# Altium PCB main.PcbDoc
Units mm, origin at the board's own origin, x right, y up, seen from the top; angles counter-clockwise.
Board outline 105.56 x 68.22 mm, 2 copper layers (Top Layer, Bottom Layer); 49 components, 92 nets, 304 pads, 322 vias.
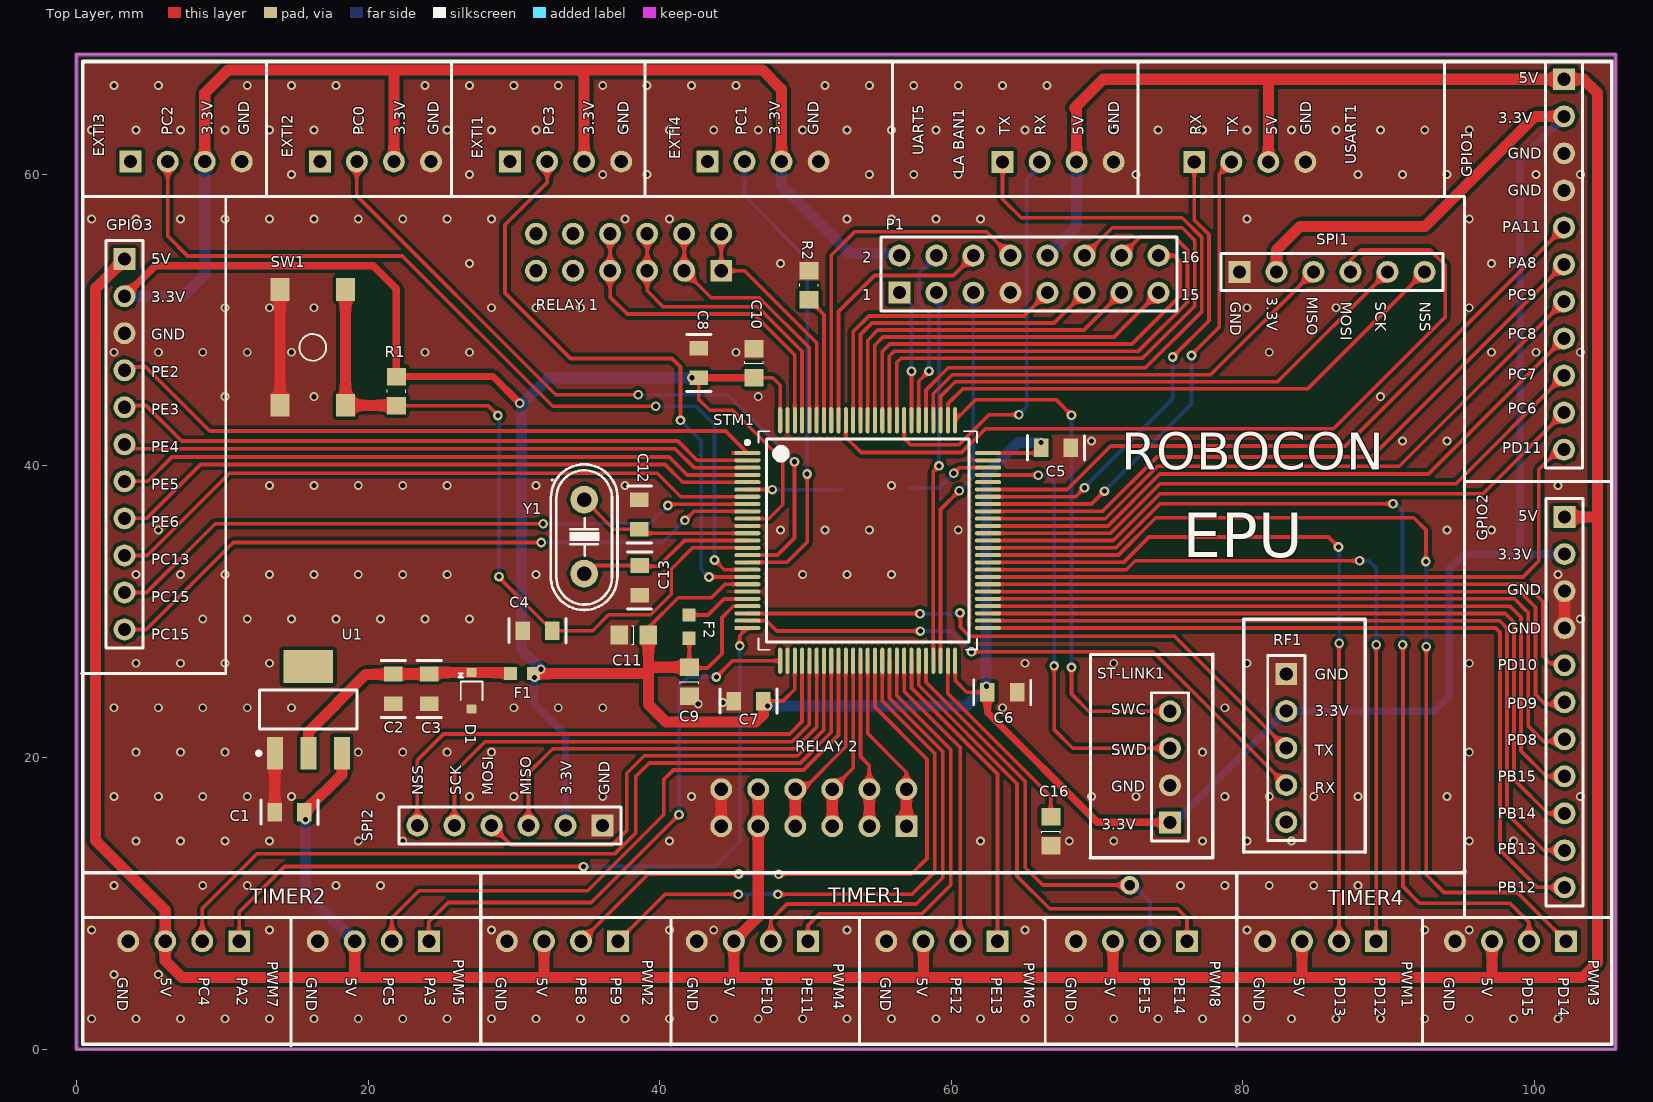
[diagram p0: Top Layer view]
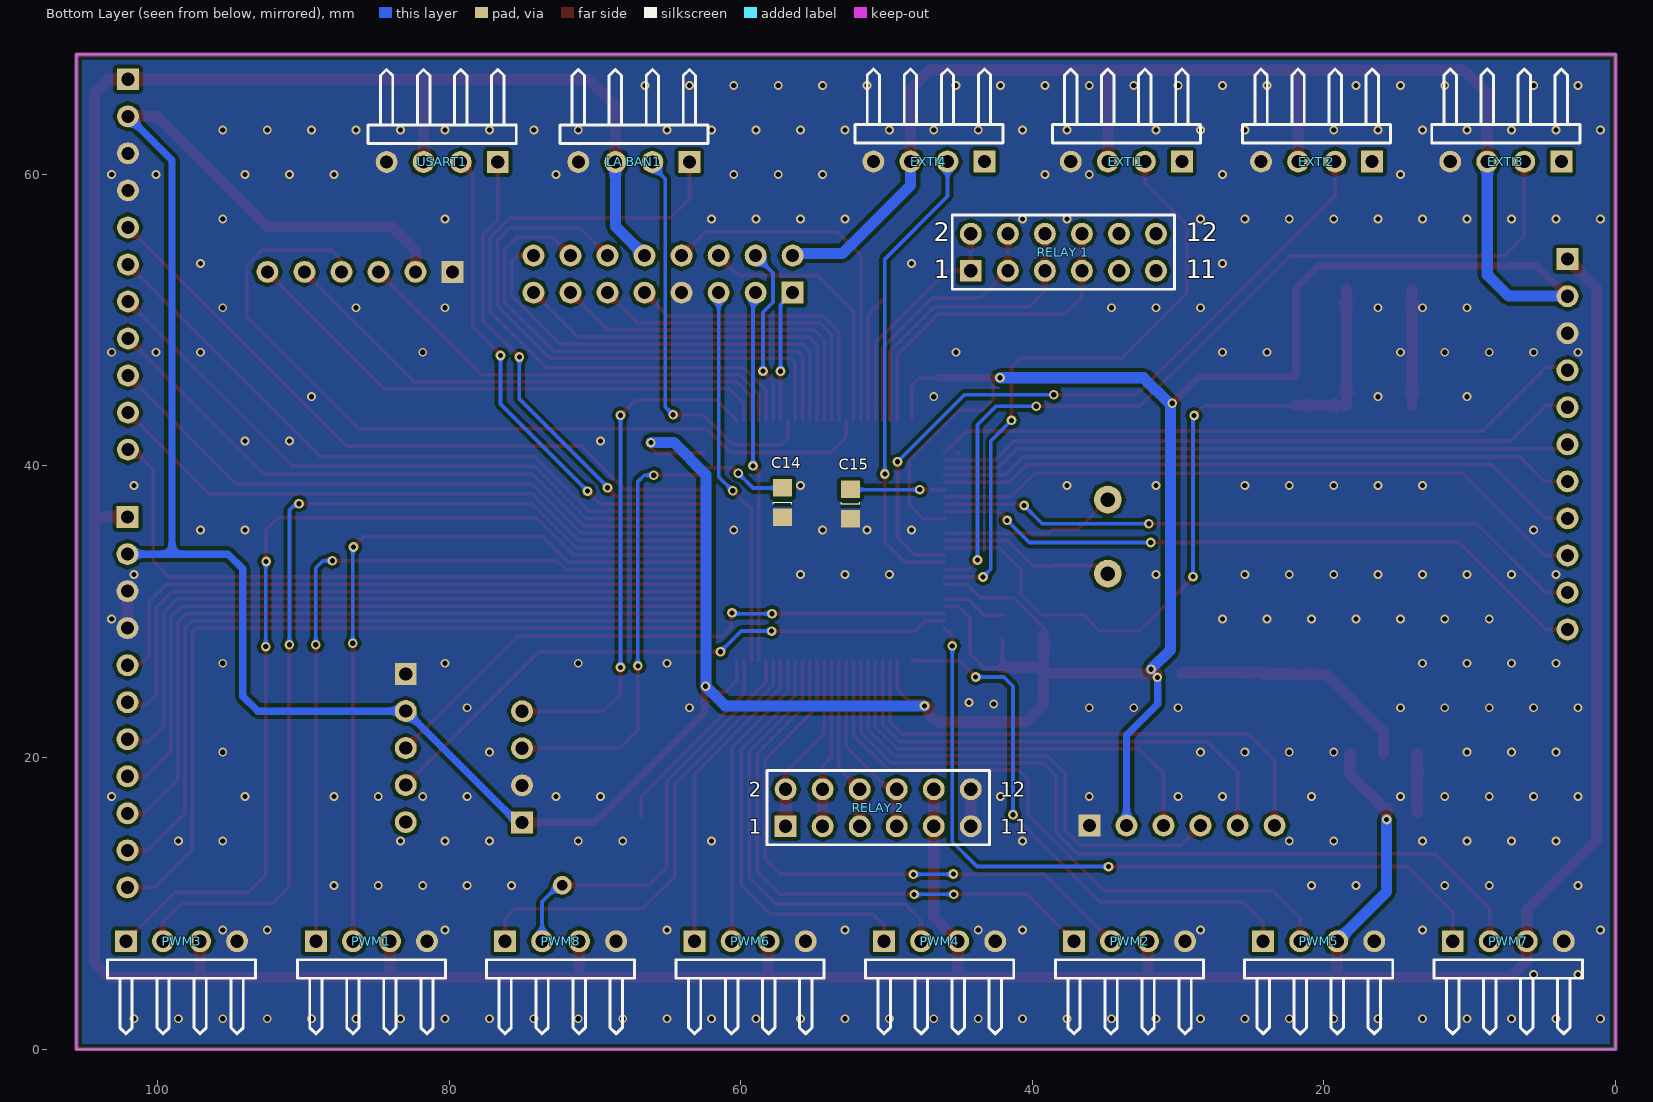
[diagram p1: Bottom Layer view, seen from below]

## Layer stack, top to bottom
Top Layer: signal copper 0.0356
Dielectric: dielectric 0.32, FR-4, Dk 4.8
Bottom Layer: signal copper 0.0356

## Board outline
0,0 105.562,0 105.562,68.224 0,68.224

## Design rules (kind name [scope] priority, off if disabled: settings)
Clearance [All] p1: gap=0.229
PolygonConnect [All] p1: connectstyle=Direct reliefconductorwidth=0.508 reliefentries=4 polygonreliefangle="90 Angle"
RoutingVias [All] p1: holewidth=0.356 width=0.66 viastyle="Through Hole" minholewidth=0.356 minwidth=0.66 maxholewidth=0.356 maxwidth=0.66
SilkscreenOverComponentPads SilkToSolderMaskClearance [IsPad] p1: minsilkscreentomaskgap=0.254
SolderMaskExpansion [All] p1: expansion=0.102
Width [All] p1: maxlimit=0.762 minlimit=0.254 preferedwidth=0.508
27 further rules are at their usual default settings.

## Components (designator, comment, footprint, x,y, rotation, side; value= is the part's Value field where it differs from the comment)
C1 "0.1uF" C0805#1 14.605,16.256 r180 top
C2 "10uF" C0805#1 21.742,24.714 r270 top
C3 "0.1uF" C0805#1 24.206,24.714 r270 top
C4 "0.1uF" C0805#1 31.623,28.702 r180 top
C5 "0.1uF" C0805#1 67.183,41.25 r0 top
C6 "0.1uF" C0805#1 63.5,24.486 r0 top
C7 "0.1uF" C0805#1 46.101,23.876 r180 top
C8 "0.1uF" C0805#1 42.672,47.066 r90 top
C9 "0.1uF" C0805#2 42.037,25.197 r270 top
C10 "0.1uF" C0805#2 46.482,47.041 r90 top
C11 "0.1uF" C0805#2 38.227,28.397 r180 top
C12 "C33pf 0805" C0805#1 38.608,36.678 r90 top
C13 "C33pf 0805" C0805#1 38.633,32.156 r270 top
C14 "2.2uF" C0805#2 57.125,37.49 r270 bottom
C15 "4.7uF" C0805#2 52.476,37.389 r90 bottom
C16 "2.2uF" C0805#2 66.827,14.935 r270 top
D1 "D14V0S1U2WS-7" SOD323 27.102,24.587 r270 top
EXTI1 "Header 4H" HDR1X4H 29.741,60.876 r0 bottom locked
EXTI2 "Header 4H" HDR1X4H 16.691,60.876 r0 bottom locked
EXTI3 "Header 4H" HDR1X4H 3.716,60.876 r0 bottom locked
EXTI4 "Header 4H" HDR1X4H 43.282,60.884 r0 bottom
F1 "FBMH1608HM221" L0603 30.556,25.756 r0 top
F2 "BK1608HM102-T" L0603 42.012,28.981 r90 top
GPIO1 "Header 11" HDR1X11 102.032,66.523 r270 top
GPIO2 "Header 11" HDR1X11 102.066,36.496 r270 top
GPIO3 "Header 11" HDR1X11 3.291,54.186 r270 top
"LA BAN1" "Header 4H" HDR1X4H 63.521,60.851 r0 bottom locked
P1 "Header 8X2" HDR2X8 56.439,51.892 r0 top
PWM1 "Header 4H" HDR1X4H 89.141,7.401 r180 bottom locked
PWM2 "Header 4H" HDR1X4H 37.141,7.401 r180 bottom locked
PWM3 "Header 4H" HDR1X4H 102.166,7.401 r180 bottom locked
PWM4 "Header 4H" HDR1X4H 50.166,7.401 r180 bottom locked
PWM5 "Header 4H" HDR1X4H 24.166,7.401 r180 bottom locked
PWM6 "Header 4H" HDR1X4H 63.166,7.401 r180 bottom locked
PWM7 "Header 4H" HDR1X4H 11.166,7.401 r180 bottom locked
PWM8 "Header 4H" HDR1X4H 76.166,7.401 r180 bottom locked
R1 "4.7k" R0805 21.946,45.136 r270 top
R2 "4.7k" R0805 50.241,52.4 r90 top
"RELAY 1" "Header 6X2" HDR2X6 44.221,53.391 r180 bottom locked
"RELAY 2" "Header 6X2" HDR2X6 56.921,15.291 r180 bottom locked
RF1 "Header 5" HDR1X5 82.982,25.73 r270 top
SPI1 "Header 6" HDR1X6 79.768,53.314 r0 top
SPI2 "Header 6" HDR1X6 36.081,15.342 r180 top
ST-LINK1 "Header 4" HDR1X4 74.998,15.556 r90 top
STM1 "STM32F405VGT6TR" TSQFP50P1750X1750X160-100N 54.27,34.888 r0 top locked
SW1 "SW-SPST-4P-PTS645SM43SMTR92 LFS" "SW-PTS645SM43SMTR92 LFS" 16.205,48.133 r90 top
U1 "AMS1117_3.3V" SOT233X180-4N 15.9,23.266 r90 top
USART1 "Header 4H" HDR1X4H 76.671,60.851 r0 bottom locked
Y1 "8MHz" XT2 34.823,35.154 r90 top

## Footprints (in the part's own frame and the unit in brackets; to place one, negate y for a bottom-side part, rotate by r counter-clockwise, add the part's x,y. Pads: shape width x height; smd on the part's side, far side on the other; paste and mask are expansions set on the pad)
C0805#1 [mm] "Chip Resistor; Body 2.0 x 1.3 mm (LxW typ)"
  rect 1x1.27 smd: 1(-1.016,0) 2(1.016,0)
  silkscreen extent -1.96,-0.84 1.96,0.84, body extent -1,-0.62 1,0.63, height 0.78
C0805#2 [mm]
  rect 1.2x1.3 smd: 1(-1,0) 2(1,0)
  Top Layer pour cut-out: -0.254,0.66 0.254,0.66 0.254,-0.66 -0.254,-0.66
  silkscreen extent 0,-0.64 0.13,0.64, body extent -1,-0.6 1,0.6, height 0.8
HDR1X4 [mm] "Connector; Header; 4 Position"
  rect 1.5x1.5 hole 0.9: 1(0,0)
  round 1.5 hole 0.9: 2(2.54,0) 3(5.08,0) 4(7.62,0)
  silkscreen extent -1.27,-1.27 8.89,1.27, body extent -1.27,-1.27 8.89,1.27, height 7
HDR1X4H [mm] "Connector; Header; 4 Position; Right Angle"
  rect 1.5x1.5 hole 0.9: 1(0,0)
  round 1.5 hole 0.9: 2(2.54,0) 3(5.08,0) 4(7.62,0)
  silkscreen extent -1.27,-6.35 8.89,-1.27, body extent -1.27,-7 8.89,1.27, height 4.33
HDR1X5 [mm] "Connector; Header; 5 Position"
  rect 1.5x1.5 hole 0.9: 1(0,0)
  round 1.5 hole 0.9: 2(2.54,0) 3(5.08,0) 4(7.62,0) 5(10.16,0)
  silkscreen extent -1.27,-1.27 11.43,1.27, body extent -1.27,-1.27 11.43,1.27, height 7
HDR1X6 [mm] "Connector; Header; 6 Position"
  rect 1.5x1.5 hole 0.9: 1(0,0)
  round 1.5 hole 0.9: 2(2.54,0) 3(5.08,0) 4(7.62,0) 5(10.16,0) 6(12.7,0)
  silkscreen extent -1.27,-1.27 13.97,1.27, body extent -1.27,-1.27 13.97,1.27, height 7
HDR1X11 [mm] "Connector; Header; 11 Position"
  rect 1.5x1.5 hole 0.9: 1(0,0)
  round 1.5 hole 0.9: 2(2.54,0) 3(5.08,0) 4(7.62,0) 5(10.16,0) 6(12.7,0) 7(15.24,0) 8(17.78,0) 9(20.32,0) 10(22.86,0) 11(25.4,0)
  silkscreen extent -1.27,-1.27 26.67,1.27, body extent -1.27,-1.27 26.67,1.27, height 7
HDR2X6 [mm] "Connector; Header; 6x2 Position"
  rect 1.5x1.5 hole 0.9: 1(0,0)
  round 1.5 hole 0.9: 2(0,2.54) 3(2.54,0) 4(2.54,2.54) 5(5.08,0) 6(5.08,2.54) 7(7.62,0) 8(7.62,2.54) 9(10.16,0) 10(10.16,2.54) 11(12.7,0) 12(12.7,2.54)
  silkscreen extent -1.27,-1.27 13.97,3.81, body extent -1.27,-1.27 13.97,3.81, height 7
HDR2X8 [mm] "Connector; Header; 8x2 Position"
  rect 1.5x1.5 hole 0.9: 1(0,0)
  round 1.5 hole 0.9: 2(0,2.54) 3(2.54,0) 4(2.54,2.54) 5(5.08,0) 6(5.08,2.54) 7(7.62,0) 8(7.62,2.54) 9(10.16,0) 10(10.16,2.54) 11(12.7,0) 12(12.7,2.54) 13(15.24,0) 14(15.24,2.54) 15(17.78,0) 16(17.78,2.54)
  silkscreen extent -1.27,-1.27 19.05,3.81, body extent -1.27,-1.27 19.05,3.81, height 1.5
L0603 [mm]
  rect 0.9x0.9 smd: 1(-0.8,0) 2(0.8,0)
  Top Layer pour cut-out: -0.254,0.508 0.254,0.508 0.254,-0.508 -0.254,-0.508
  body extent -0.8,-0.4 0.8,0.4, height 0.6
R0805 [mm]
  rect 1.2x1.3 smd: 1(-1,0) 2(1,0)
  Top Layer pour cut-out: -0.254,0.762 0.254,0.762 0.254,-0.762 -0.254,-0.762
  silkscreen extent -0.08,-0.64 0.1,0.64, body extent -1,-0.6 1,0.6, height 0.6
SOD323 [mm] "SOD-323; 2 Leads; Body 1.8 x 1.35 mm, (LxW)"
  round 0.508 on Mech14: 0(0,0)
  rrect25% 0.6x0.7 smd: 1(1.25,0) 2(-1.25,0)
  silkscreen extent -1.2,-0.9 0.64,0.75, body extent -1.3,-0.68 1.3,0.68, height 1.1
SOT233X180-4N [mm] "SOT223, 4-Leads, Body 6.50x7.25mm (avg), Pitch 2.30mm, IPC Medium Density"
  rect 2.25x1.1 smd: 1(-2.975,2.3) 2(-2.975,0) 3(-2.975,-2.3)
  rect 2.25x3.4 smd: 4(2.975,0)
  silkscreen extent -3.1,-3.35 1.37,3.52, body extent -3.62,-3.35 3.62,3.35, height 1.8
"SW-PTS645SM43SMTR92 LFS" [mm]
  rect 1.55x1.3 smd: 1(-3.975,2.25) 2(3.975,2.25) 3(-3.975,-2.25) 4(3.975,-2.25)
  silkscreen extent -0.91,-0.92 0.91,0.91, body extent -4.5,-3 4.5,3, height 5
TSQFP50P1750X1750X160-100N [mm] "TSQFP, 100-Leads, Body 14.50x14.50mm, Pitch 0.50mm, IPC Medium Density"
  oval 1.8x0.279 smd: 1(-8.25,6) 2(-8.25,5.5) 3(-8.25,5) 4(-8.25,4.5) 5(-8.25,4) 6(-8.25,3.5) 7(-8.25,3) 8(-8.25,2.5) 9(-8.25,2) 10(-8.25,1.5) 11(-8.25,1) 12(-8.25,0.5) 13(-8.25,0) 14(-8.25,-0.5) 15(-8.25,-1) 16(-8.25,-1.5) 17(-8.25,-2) 18(-8.25,-2.5) 19(-8.25,-3) 20(-8.25,-3.5) 21(-8.25,-4) 22(-8.25,-4.5) 23(-8.25,-5) 24(-8.25,-5.5) 25(-8.25,-6) 51(8.25,-6) 52(8.25,-5.5) 53(8.25,-5) 54(8.25,-4.5) 55(8.25,-4) 56(8.25,-3.5) 57(8.25,-3) 58(8.25,-2.5) 59(8.25,-2) 60(8.25,-1.5) 61(8.25,-1) 62(8.25,-0.5) 63(8.25,0) 64(8.25,0.5) 65(8.25,1) 66(8.25,1.5) 67(8.25,2) 68(8.25,2.5) 69(8.25,3) 70(8.25,3.5) 71(8.25,4) 72(8.25,4.5) 73(8.25,5) 74(8.25,5.5) 75(8.25,6)
  oval 0.279x1.8 smd: 26(-6,-8.25) 27(-5.5,-8.25) 28(-5,-8.25) 29(-4.5,-8.25) 30(-4,-8.25) 31(-3.5,-8.25) 32(-3,-8.25) 33(-2.5,-8.25) 34(-2,-8.25) 35(-1.5,-8.25) 36(-1,-8.25) 37(-0.5,-8.25) 38(0,-8.25) 39(0.5,-8.25) 40(1,-8.25) 41(1.5,-8.25) 42(2,-8.25) 43(2.5,-8.25) 44(3,-8.25) 45(3.5,-8.25) 46(4,-8.25) 47(4.5,-8.25) 48(5,-8.25) 49(5.5,-8.25) 50(6,-8.25) 76(6,8.25) 77(5.5,8.25) 78(5,8.25) 79(4.5,8.25) 80(4,8.25) 81(3.5,8.25) 82(3,8.25) 83(2.5,8.25) 84(2,8.25) 85(1.5,8.25) 86(1,8.25) 87(0.5,8.25) 88(0,8.25) 89(-0.5,8.25) 90(-1,8.25) 91(-1.5,8.25) 92(-2,8.25) 93(-2.5,8.25) 94(-3,8.25) 95(-3.5,8.25) 96(-4,8.25) 97(-4.5,8.25) 98(-5,8.25) 99(-5.5,8.25) 100(-6,8.25)
  silkscreen extent -8.37,-7.49 7.49,7.49, body extent -8.75,-8.75 8.75,8.75, height 1.6
XT2 [mm] "Footpin for Crystal 2 pin"
  round 0 all layers, no hole: 0(0,0)
  round 1.905 hole 1: 1(-2.54,0) 2(2.54,0)
  silkscreen extent -5.03,-2.29 4.96,2.29, body extent -5.93,-2.36 5.42,2.29, height 3.5

## Part data
C1 C3 C4 C5 C6 C7 C8 C9 C10 C11: library part C0.1uF-0805, "0.1µF ±10% 50V Ceramic Capacitor X7R 0805"
C2: library part C10uF_0805, "10µF 6.3V Ceramic Capacitor X5R 0805 (2012 Metric) 0.079\" L x 0.049\" W (2.00mm x 1.25mm)"
C12 C13: "33pF ±1% 50V Ceramic Capacitor C0G, NP0 0805 (2012 Metric)"
C14 C15 C16: library part C4.7uF_0805, "4.7µF 16V Ceramic Capacitor X7R 0805 (2012 Metric) 0.079\" L x 0.049\" W (2.00mm x 1.25mm)"
D1: library part "TVS DIODE 14VWM 26VC SOD323_1", "TVS DIODE 14VWM 26VC SOD323"
EXTI1 EXTI2 EXTI3 EXTI4 "LA BAN1" PWM1 PWM2 PWM3 PWM4 PWM5 PWM6 PWM7 PWM8 USART1: "Header, 4-Pin, Right Angle"
F2: library part FERRITE, "1 KOHM 0603 1LN"
GPIO1 GPIO2 GPIO3: "Header, 11-Pin"
P1: "Header, 8-Pin, Dual row"
R1 R2: library part R4.7k_0805, "4.7k Ohm ±1% 0.125W, 1/8W Surface Mount Resistor Thick Film ±100ppm/°C 0805"
"RELAY 1" "RELAY 2": "Header, 6-Pin, Dual row"
RF1: "Header, 5-Pin"
SPI1 SPI2: "Header, 6-Pin"
ST-LINK1: "Header, 4-Pin"
STM1: library part STM32F405VGTx, "MCU 32BIT 1MB FLASH 100LQFP"
SW1: "Tactile Switch SPST-NO Top Actuated Surface Mount"
U1: "Linear Voltage Regulator IC Positive Fixed 1 Output 3.3V 800mA SOT-223-4"
Y1: library part Crystal, "Crystal Oscillator"

## Via types
v1: diameter 0.61, hole 0.356, Top Layer to Bottom Layer, 263 vias
v2: diameter 0.66, hole 0.356, Top Layer to Bottom Layer, tented both sides, 55 vias
v3: diameter 0.61, hole 0.356, Top Layer to Bottom Layer, tented both sides, 2 vias
v4: diameter 1.27, hole 0.711, Top Layer to Bottom Layer, tented both sides, 1 vias
v5: diameter 0.66, hole 0.356, Top Layer to Bottom Layer, 1 vias

## Nets (pads, with @x,y where several pads share a name; then routed paths per layer and width w, separated by ;. In a path a pad name is that pad's centre, name@x,y a point inside that pad or via, vN(x,y) a via of type N, cw(c..) or ccw(c..) an arc to the next point about the centre after c; other vN are vias at no path point)
3.3V: C5.1 C6.1 C7.1 C8.1 C9.1 C10.1 C11.1 EXTI1.3 EXTI2.3 EXTI3.3 EXTI4.3 F1.2 F2.1 GPIO1.2 GPIO2.2 GPIO3.2 P1.2 R1.1 RF1.2 SPI1.2 SPI2.2 ST-LINK1.1 STM1.10 STM1.19 STM1.22 STM1.28 STM1.50 STM1.75 STM1.100 | length 391.6
  Top Layer w0.254: C11.1 39.227,28.915 41.275,30.963 43.561,30.963 44.481,31.883 46.015,31.883 STM1.19 STM1.19@46.015,31.892 ; F2.1@42.088,28.181 42.037,28.131 C9.1 42.097,26.137 43.282,26.137 44.272,27.127 44.272,29.601 45.054,30.383 46.015,30.383 STM1.22 ; C8.1 42.672,44.577 43.434,43.815 45.009,43.815 48.438,40.386 48.438,37.338 47.487,36.388 STM1.10 ; C10.1@46.473,46.05 47.752,46.05 48.27,45.532 STM1.100 ; C7.1@47.396,23.876 48.463,23.876 49.27,24.683 STM1.28 ; STM1.50 60.27,25.277 61.062,24.486 C6.1 ; STM1.75 65.805,40.888 C5.1
  Top Layer w0.508: GPIO3.2 5.392,53.746 20.345,53.746 21.946,52.146 R1.1 28.566,46.136 v5(30.404,44.298) ; C8.1 C10.1@46.473,46.05 ; C6.1 62.484,23.089 70.017,15.556 ST-LINK1.1
  Top Layer w0.762: EXTI3.3 8.796,65.565 10.389,67.158 21.869,67.158 ; EXTI2.3 21.771,67.06 21.869,67.158 ; F1.2@31.42,25.756 39.151,25.756 39.227,25.832 ; EXTI1.3 34.821,66.829 34.493,67.158 ; C11.1 39.227,26.264 ; C9.1 39.294,26.197 39.227,26.264 ; C7.1@47.117,23.546 47.117,22.962 46.584,22.428 40.437,22.428 39.227,23.638 39.227,25.832 ; EXTI4.3 48.362,65.837 47.041,67.158 34.493,67.158 ; SPI1.2 82.308,54.825 83.922,56.439 92.507,56.439 100.051,63.983 GPIO1.2 ; 21.869,67.158 34.493,67.158 ; 39.227,25.832 39.227,26.264
  Bottom Layer w0.508: v2(31.42,25.502) 31.394,25.476 31.394,23.673 33.541,21.526 SPI2.2 ; ST-LINK1.1 75.347,15.556 RF1.2 93.142,23.19 94.158,24.206 94.158,32.944 95.17,33.956 99.009,33.956 ; GPIO1.2 99.009,60.96 99.009,33.956 ; GPIO2.2 99.009,33.956
  Bottom Layer w0.762: GPIO3.2 7.348,51.646 8.796,53.094 EXTI3.3 ; v2(31.852,26.06) 30.531,27.381 30.531,44.221 32.36,46.05 v2(42.215,46.05) ; v2(47.396,23.546) 61.062,23.546 v2(62.408,24.892) 62.382,24.917 62.382,39.395 64.592,41.605 v2(66.167,41.605) ; EXTI4.3 48.362,59.233 53.01,54.585 56.286,54.585 P1.2
5V: "LA BAN1.3" "RELAY 2.9" "RELAY 2.10" C1.1 GPIO1.1 GPIO2.1 GPIO3.1 P1.10 PWM1.3 PWM2.3 PWM3.3 PWM4.3 PWM5.3 PWM6.3 PWM7.3 PWM8.3 U1.3 USART1.3 | length 308.5
  Top Layer w0.762: GPIO3.1 1.295,52.19 1.295,14.326 6.086,9.535 PWM7.3 6.086,6.08 7.239,4.928 58.064,4.928 ; C1.1 18.2,18.835 U1.3 ; 19.086,5.044 PWM5.3 ; 32.061,4.985 PWM2.3 ; 45.086,5.158 PWM4.3 46.761,9.076 46.761,15.291 46.761,17.831 ; PWM6.3 58.086,4.95 58.064,4.928 ; 68.601,60.851 68.601,64.418 68.453,64.567 70.409,66.523 81.737,66.523 ; 71.086,4.936 PWM8.3 ; USART1.3 81.751,66.508 81.737,66.523 ; 84.061,5.067 PWM1.3 ; PWM3.3 97.086,4.961 97.053,4.928 ; GPIO2.1 104.296,36.496 104.318,36.474 ; 58.064,4.928 97.053,4.928 ; 81.737,66.523 GPIO1.1 103.378,66.523 104.318,65.583 104.318,36.474 ; 97.053,4.928 103.302,4.928 104.318,5.944 104.318,36.474
  Bottom Layer w0.762: v2(15.697,15.748) 15.697,10.79 PWM5.3 ; P1.10 68.601,56.435 68.601,60.851
BOOT0: R2.1 STM1.94 | length 8.7
  Top Layer w0.254: R2.1 51.27,50.372 STM1.94
D4: P1.15 STM1.87 | length 26.1
  Top Layer w0.254: STM1.87 54.765,43.142 54.765,44.103 54.752,44.116 54.752,48.275 55.321,48.844 71.171,48.844 P1.15
D5: P1.13 STM1.88 | length 24.3
  Top Layer w0.254: STM1.88 54.27,48.631 54.966,49.327 69.113,49.327 P1.13
D6: P1.11 STM1.89 | length 22.4
  Top Layer w0.254: STM1.89 53.77,49.023 54.556,49.809 67.056,49.809 P1.11
D7: P1.9 STM1.90 | length 20.5
  Top Layer w0.254: STM1.90 53.27,49.206 54.356,50.292 64.999,50.292 P1.9
DIV1: PWM2.2 STM1.39 | length 41.2
  Top Layer w0.254: PWM2.2 39.215,12.014 v2(45.415,12.014) ; v2(48.158,11.989) 57.252,11.989 58.344,13.081 58.344,19.888 54.77,23.462 STM1.39
  Bottom Layer w0.254: v2(45.415,12.014) 45.441,11.989 v2(48.158,11.989)
DIV2: PWM4.2 STM1.41 | length 30.8
  Top Layer w0.254: PWM4.2 47.626,8.841 48.743,9.957 57.607,9.957 59.411,11.76 59.411,20.425 55.77,24.066 STM1.41
DIV3: PWM6.2 STM1.43 | length 20.8
  Top Layer w0.254: STM1.43 56.77,24.536 60.626,20.679 PWM6.2
DIV4: PWM8.2 STM1.46 | length 29.2
  Top Layer w0.254: STM1.46 58.27,25.169 65.075,18.364 65.075,12.446 66.269,11.252 v4(72.238,11.252)
  Bottom Layer w0.254: v4(72.238,11.252) 72.492,11.252 73.626,10.117 PWM8.2
DIV5: PWM7.2 STM1.33 | length 57.6
  Top Layer w0.254: PWM7.2 8.626,9.642 12.395,13.411 36.932,13.411 38.354,14.834 38.354,18.694 39.294,19.634 49.669,19.634 51.765,21.73 51.765,26.633 STM1.33
DIV6: PWM5.2 STM1.34 | length 43.9
  Top Layer w0.254: PWM5.2 21.626,9.003 23.495,10.871 35.074,10.871 40.284,16.082 40.284,18.491 40.945,19.152 49.869,19.152 52.265,21.548 52.265,26.633 STM1.34
DIV7: PWM3.2 STM1.62 | length 66.7
  Top Layer w0.254: STM1.62 62.525,34.383 71.286,34.383 74.317,37.414 v2(90.297,37.414) ; v2(90.957,27.737) 90.983,27.711 90.983,11.151 92.126,10.008 98.323,10.008 99.626,8.705 PWM3.2
  Bottom Layer w0.254: v2(90.297,37.414) 90.526,37.414 90.957,36.982 v2(90.957,27.737)
DIV8: PWM1.2 STM1.60 | length 52.1
  Top Layer w0.254: STM1.60 71.818,33.388 73.558,35.128 85.877,35.128 v2(86.563,34.442) ; PWM1.2 86.601,27.826 v2(86.614,27.838)
  Bottom Layer w0.254: v2(86.563,34.442) 86.614,34.392 v2(86.614,27.838)
EN: P1.16 STM1.86 | length 30.7
  Top Layer w0.254: STM1.86 55.27,47.853 55.778,48.362 72.39,48.362 75.717,51.689 75.717,54 75.286,54.432 P1.16
EXTI0: EXTI2.2 STM1.15 | length 48.9
  Top Layer w0.254: EXTI2.2 19.231,58.518 32.868,44.882 v2(38.532,44.882) ; STM1.15 46.025,33.892 48.091,33.892 49.251,35.052 v2(49.251,40.284)
  Bottom Layer w0.254: v2(38.532,44.882) 44.653,44.882 v2(49.251,40.284)
EXTI1: EXTI4.2 STM1.16 | length 32.6
  Top Layer w0.254: STM1.16 46.025,33.392 48.734,33.392 50.114,34.773 v2(50.114,39.446)
  Bottom Layer w0.254: EXTI4.2 45.822,58.496 50.114,54.204 v2(50.114,39.446)
EXTI2: EXTI3.2 STM1.17 | length 59.8
  Top Layer w0.254: EXTI3.2 6.256,55.77 7.62,54.407 22.352,54.407 32.664,44.094 v2(39.726,44.094) ; v2(43.764,33.553) 44.43,32.888 STM1.17
  Bottom Layer w0.254: v2(39.726,44.094) 42.494,44.094 43.764,42.824 v2(43.764,33.553)
EXTI3: EXTI1.2 STM1.18 | length 42.2
  Top Layer w0.254: EXTI1.2 32.281,59.434 29.388,56.54 29.388,51.867 33.884,47.371 40.843,47.371 41.427,46.787 v2(41.427,43.129) ; v2(43.383,32.385) 43.386,32.388 STM1.18
  Bottom Layer w0.254: v2(41.427,43.129) 42.85,41.707 42.85,32.918 v2(43.383,32.385)
GND: "LA BAN1.4" "RELAY 2.11" "RELAY 2.12" C1.2 C2.2 C3.2 C4.2 C5.2 C6.2 C7.2 C8.2 C9.2 C10.2 C11.2 C12.2 C13.2 C14.2 C15.1 C16.2 D1.1 EXTI1.4 EXTI2.4 EXTI3.4 EXTI4.4 GPIO1.3 GPIO1.4 GPIO2.3 GPIO2.4 GPIO3.3 P1.7 PWM1.4 PWM2.4 PWM3.4 PWM4.4 PWM5.4 PWM6.4 PWM7.4 PWM8.4 R2.2 RF1.1 SPI1.1 SPI2.1 ST-LINK1.2 STM1.11 STM1.20 STM1.27 STM1.74 STM1.99 SW1.1 SW1.2 U1.1 USART1.4 | length 17.1
  Top Layer w0.762: C1.2@13.579,16.246 C1.2 13.6,16.267 U1.1 ; SW1.1 SW1.2 ; 44.221,15.291 44.221,17.831 ; GPIO2.4 GPIO2.3
  other v1: 1.041,2.083 4.089,2.083 7.137,2.083 10.185,2.083 13.233,2.083 16.281,2.083 19.329,2.083 22.377,2.083 25.425,2.083 28.473,2.083 31.521,2.083 34.569,2.083 37.617,2.083 40.665,2.083 43.713,2.083 46.761,2.083 49.809,2.083 52.857,2.083 55.905,2.083 58.953,2.083 62.001,2.083 65.049,2.083 68.097,2.083 71.145,2.083 74.193,2.083 77.241,2.083 80.289,2.083 83.337,2.083 86.385,2.083 89.433,2.083 92.481,2.083 95.529,2.083 98.577,2.083 101.625,2.083 2.565,5.131 5.613,5.131 1.041,8.179 13.233,8.179 28.473,8.179 40.665,8.179 43.713,8.179 52.857,8.179 65.049,8.179 80.289,8.179 92.481,8.179 95.529,8.179 2.565,11.227 8.661,11.227 11.709,11.227 17.805,11.227 20.853,11.227 75.717,11.227 78.765,11.227 81.813,11.227 84.861,11.227 87.909,11.227 4.089,14.275 7.137,14.275 10.185,14.275 13.233,14.275 19.329,14.275 22.377,14.275 40.665,14.275 62.001,14.275 68.097,14.275 71.145,14.275 77.241,14.275 80.289,14.275 83.337,14.275 95.529,14.275 98.577,14.275 2.565,17.323 5.613,17.323 8.661,17.323 11.709,17.323 14.757,17.323 20.853,17.323 26.949,17.323 29.997,17.323 36.093,17.323 42.189,17.323 69.621,17.323 72.669,17.323 78.765,17.323 81.813,17.323 84.861,17.323 87.909,17.323 94.005,17.323 103.149,17.323 4.089,20.371 7.137,20.371 10.185,20.371 19.329,20.371 22.377,20.371 25.425,20.371 28.473,20.371 77.241,20.371 95.529,20.371 2.565,23.419 5.613,23.419 8.661,23.419 11.709,23.419 14.757,23.419 29.997,23.419 33.045,23.419 36.093,23.419 63.525,23.419 78.765,23.419 4.089,26.467 7.137,26.467 10.185,26.467 13.233,26.467 65.049,26.467 71.145,26.467 80.289,26.467 95.529,26.467 8.661,29.515 11.709,29.515 14.757,29.515 17.805,29.515 20.853,29.515 23.901,29.515 26.949,29.515 103.149,29.515 4.089,32.563 7.137,32.563 10.185,32.563 13.233,32.563 16.281,32.563 19.329,32.563 22.377,32.563 25.425,32.563 31.521,32.563 49.809,32.563 52.857,32.563 55.905,32.563 101.625,32.563 5.613,35.611 48.285,35.611 51.333,35.611 54.381,35.611 60.477,35.611 94.005,35.611 97.053,35.611 13.233,38.659 16.281,38.659 19.329,38.659 22.377,38.659 25.425,38.659 31.521,38.659 37.617,38.659 55.905,38.659 101.625,38.659 69.621,41.707 90.957,41.707 94.005,41.707 10.185,44.755 16.281,44.755 46.761,44.755 89.433,44.755 2.565,47.803 5.613,47.803 8.661,47.803 11.709,47.803 14.757,47.803 23.901,47.803 26.949,47.803 45.237,47.803 81.813,47.803 97.053,47.803 100.101,47.803 103.149,47.803 10.185,50.851 13.233,50.851 16.281,50.851 28.473,50.851 31.521,50.851 34.569,50.851 80.289,50.851 86.385,50.851 95.529,50.851 26.949,53.899 48.285,53.899 97.053,53.899 1.041,56.947 4.089,56.947 7.137,56.947 10.185,56.947 13.233,56.947 16.281,56.947 19.329,56.947 22.377,56.947 25.425,56.947 28.473,56.947 37.617,56.947 40.665,56.947 52.857,56.947 55.905,56.947 58.953,56.947 62.001,56.947 80.289,56.947 95.529,56.947 14.757,59.995 26.949,59.995 36.093,59.995 39.141,59.995 54.381,59.995 57.429,59.995 60.477,59.995 72.669,59.995 87.909,59.995 90.957,59.995 94.005,59.995 100.101,59.995 103.149,59.995 1.041,63.043 4.089,63.043 7.137,63.043 10.185,63.043 13.233,63.043 16.281,63.043 19.329,63.043 25.425,63.043 28.473,63.043 31.521,63.043 37.617,63.043 40.665,63.043 43.713,63.043 46.761,63.043 49.809,63.043 52.857,63.043 55.905,63.043 58.953,63.043 62.001,63.043 65.049,63.043 71.145,63.043 74.193,63.043 77.241,63.043 80.289,63.043 83.337,63.043 86.385,63.043 89.433,63.043 92.481,63.043 95.529,63.043 2.565,66.091 5.613,66.091 11.709,66.091 14.757,66.091 17.805,66.091 23.901,66.091 26.949,66.091 29.997,66.091 33.045,66.091 36.093,66.091 39.141,66.091 42.189,66.091 45.237,66.091 51.333,66.091 54.381,66.091 57.429,66.091 60.477,66.091 63.525,66.091 66.573,66.091
  other v3: 42.647,23.673 44.348,23.774
IN: C12.1 STM1.12 Y1.2 | length 12.2
  Top Layer w0.254: Y1.2 36.855,35.662 C12.1 38.882,35.388 STM1.12 STM1.12@46.015,35.392
N1: P1.8 STM1.93 | length 24.9
  Top Layer w0.254: STM1.93 51.77,54.462 53.365,56.058 62.433,56.058 P1.8
N2: P1.6 STM1.92 | length 18.3
  Top Layer w0.254: STM1.92 52.27,50.593 54.737,53.061 60.147,53.061 P1.6
N3: P1.4 STM1.81 | length 12.4
  Top Layer w0.254: STM1.81 57.77,45.806 v2(58.471,46.507)
  Bottom Layer w0.254: v2(58.471,46.507) 58.471,50.543 57.785,51.228 57.785,53.238 P1.4
N4: P1.1 STM1.82 | length 9.1
  Top Layer w0.254: STM1.82 v2(57.27,46.5)
  Bottom Layer w0.254: P1.1 57.27,51.061 v2(57.27,46.5)
N5: P1.3 STM1.47 | length 25.5
  Top Layer w0.254: STM1.47 58.77,39.618 v2(59.157,40.005)
  Bottom Layer w0.254: P1.3 59.157,51.714 v2(59.157,40.005)
N6: P1.5 STM1.48 | length 26.2
  Top Layer w0.254: STM1.48 59.27,37.019 v2(60.554,38.303)
  Bottom Layer w0.254: v2(60.554,38.303) 61.519,39.268 P1.5
NetC2_1: C2.1 C3.1 D1.2 F1.1 U1.2 | length 17.1
  Top Layer w0.762: U1.2 15.9,21.768 19.837,25.705 21.717,25.705 C2.1 C3.1 24.313,25.837 D1.2 29.675,25.837 F1.1
NetC14_1: C14.1 STM1.73 | length 6
  Top Layer w0.254: v2(60.173,39.497) 60.563,39.888 STM1.73
  Bottom Layer w0.254: C14.1 59.166,38.49 v2(60.173,39.497)
NetC15_2: C15.2 STM1.6 | length 6.5
  Top Layer w0.254: STM1.6 47.718,38.388 v2(47.727,38.379)
  Bottom Layer w0.254: v2(47.727,38.379) 52.467,38.379 C15.2
NetC16_1: C16.1 STM1.49 | length 13.6
  Top Layer w0.254: STM1.49 59.77,24.38 66.827,17.323 C16.1
NetF2_2: F2.2 STM1.21 | length 4.5
  Top Layer w0.254: F2.2 43.32,29.781 44.421,30.883 46.015,30.883 STM1.21
NRST: C4.1 R1.2 STM1.14 SW1.3 SW1.4 | length 51.7
  Top Layer w0.254: R1.2 28.229,44.136 v2(28.905,43.459) ; v2(28.981,32.41) 28.981,32.36 C4.1 35.408,28.702 36.5,29.794 39.388,29.794 40.792,31.198 40.792,32.918 42.262,34.388 STM1.14
  Top Layer w0.762: SW1.4 SW1.3 21.923,44.158 R1.2
  Bottom Layer w0.254: v2(28.905,43.459) 28.981,43.383 v2(28.981,32.41)
NSS1: SPI2.6 STM1.29 | length 36.1
  Top Layer w0.254: SPI2.6 23.381,19.825 25.171,21.615 48.92,21.615 49.77,22.465 STM1.29
NSS3: SPI1.6 STM1.77 | length 37.6
  Top Layer w0.254: STM1.77 59.775,43.142 59.775,44.28 60.783,45.288 84.43,45.288 92.456,53.314 SPI1.6
OUT: C13.1 STM1.13 Y1.1 | length 12.2
  Top Layer w0.254: Y1.1 35.382,33.172 C13.1 38.684,33.122 39.929,33.122 41.695,34.888 STM1.13
PA8: GPIO1.6 STM1.67 | length 46.5
  Top Layer w0.254: STM1.67 70.378,36.888 74.105,40.615 88.824,40.615 GPIO1.6
PA11: GPIO1.5 STM1.70 | length 47
  Top Layer w0.254: STM1.70 67.953,38.388 70.942,41.377 87.046,41.377 GPIO1.5
PA12: STM1.71
PB12: GPIO2.11 STM1.51 | length 55.7
  Top Layer w0.254: STM1.51 97.325,28.888 97.638,28.575 97.638,13.665 100.207,11.096 GPIO2.11
PB13: GPIO2.10 STM1.52 | length 53.5
  Top Layer w0.254: STM1.52 62.525,29.383 97.617,29.383 98.12,28.88 98.12,16.154 100.639,13.636 GPIO2.10
PB14: GPIO2.9 STM1.53 | length 51.5
  Top Layer w0.254: STM1.53 98.001,29.888 98.603,29.286 98.603,18.491 100.918,16.176 GPIO2.9
PB15: GPIO2.8 STM1.54 | length 49.8
  Top Layer w0.254: STM1.54 98.314,30.388 99.085,29.616 99.085,20.447 100.817,18.716 GPIO2.8
PC6: GPIO1.10 STM1.63 | length 43.1
  Top Layer w0.254: STM1.63 71.108,34.888 74.32,38.1 96.469,38.1 GPIO1.10
PC7: GPIO1.9 STM1.64 | length 44
  Top Layer w0.254: STM1.64 70.925,35.388 74.324,38.786 94.615,38.786 GPIO1.9
PC8: GPIO1.8 STM1.65 | length 44.8
  Top Layer w0.254: STM1.65 70.743,35.888 74.302,39.446 92.735,39.446 GPIO1.8
PC9: GPIO1.7 STM1.66 | length 45.7
  Top Layer w0.254: STM1.66 70.561,36.388 74.153,39.98 90.729,39.98 GPIO1.7
PC13: GPIO3.9 STM1.7 | length 45.7
  Top Layer w0.254: GPIO3.9 4.859,33.866 10.49,39.497 39.827,39.497 41.441,37.883 46.015,37.883 STM1.7
PC14: GPIO3.10 STM1.8 | length 45.2
  Top Layer w0.254: GPIO3.10 4.808,31.326 9.525,36.043 v2(32.004,36.043) ; v2(40.564,37.287) 40.659,37.383 STM1.8@46.015,37.383
  Bottom Layer w0.254: v2(32.004,36.043) 39.319,36.043 v2(40.564,37.287)
PC15: GPIO3.11 STM1.9 | length 46.1
  Top Layer w0.254: GPIO3.11 4.783,28.786 10.744,34.747 v2(31.877,34.747) ; v2(41.732,36.271) 42.349,36.888 STM1.9
  Bottom Layer w0.254: v2(31.877,34.747) 40.208,34.747 v2(41.732,36.271)
PD8: GPIO2.7 STM1.55 | length 48.2
  Top Layer w0.254: STM1.55 98.627,30.888 99.568,29.947 99.568,22.174 100.635,21.107 101.918,21.107 GPIO2.7
PD9: GPIO2.6 STM1.56 | length 46.3
  Top Layer w0.254: STM1.56 62.525,31.383 98.995,31.383 100.076,30.302 100.076,24.333 100.762,23.647 101.918,23.647 GPIO2.6
PD10: GPIO2.5 STM1.57 | length 44
  Top Layer w0.254: STM1.57 62.525,31.883 99.384,31.883 100.584,30.683 100.584,26.949 101.067,26.467 101.935,26.467 GPIO2.5
PD11: GPIO1.11 STM1.58 | length 46.8
  Top Layer w0.254: STM1.58 99.215,32.388 100.305,33.477 100.305,39.751 101.676,41.123 GPIO1.11
PE2: GPIO3.4 STM1.1 | length 45.3
  Top Layer w0.254: GPIO3.4 3.512,46.787 4.75,46.787 9.144,42.393 44.515,42.393 STM1.1
PE3: GPIO3.5 STM1.2 | length 44.3
  Top Layer w0.254: GPIO3.5 3.411,44.145 4.775,44.145 7.214,41.707 41.25,41.707 42.569,40.388 STM1.2
PE4: GPIO3.6 STM1.3 | length 43.5
  Top Layer w0.254: GPIO3.6 3.291,41.26 3.378,41.173 41.072,41.173 42.358,39.888 STM1.3
PE5: GPIO3.7 STM1.4 | length 43.9
  Top Layer w0.254: GPIO3.7 4.884,38.946 6.553,40.615 40.665,40.615 41.892,39.388 STM1.4
PE6: GPIO3.8 STM1.5 | length 44.8
  Top Layer w0.254: GPIO3.8 4.808,36.406 8.509,40.107 40.361,40.107 41.58,38.888 STM1.5
PWM1: PWM2.1 STM1.40 | length 39.7
  Top Layer w0.254: PWM2.1 40.358,10.617 v2(45.39,10.617) ; v2(48.108,10.617) 57.302,10.617 58.877,12.192 58.877,20.269 55.27,23.877 STM1.40
  Bottom Layer w0.254: v2(45.39,10.617) v2(48.108,10.617)
PWM2: PWM4.1 STM1.42 | length 29
  Top Layer w0.254: PWM4.1 50.166,8.485 50.978,9.296 58.014,9.296 59.969,11.252 59.969,20.549 56.27,24.248 STM1.42
PWM3: PWM6.1 STM1.44 | length 21.7
  Top Layer w0.254: STM1.44 57.27,24.772 63.166,18.876 PWM6.1
PWM4: PWM8.1 STM1.45 | length 32
  Top Layer w0.254: STM1.45 57.77,24.958 64.516,18.212 64.516,11.862 66.751,9.627 75.514,9.627 76.166,8.974 PWM8.1
PWM5: PWM7.1 STM1.25 | length 53.2
  Top Layer w0.254: PWM7.1 11.166,9.414 14.275,12.522 v2(34.773,12.522) ; v2(45.491,27.661) 45.491,28.359 STM1.25
  Bottom Layer w0.254: v2(34.773,12.522) 43.79,12.522 45.491,14.224 v2(45.491,27.661)
PWM6: PWM5.1 STM1.26 | length 38
  Top Layer w0.254: PWM5.1 24.166,8.723 25.502,10.058 35.306,10.058 v2(41.326,16.078) ; v2(43.891,25.527) 45.002,26.638 STM1.26
  Bottom Layer w0.254: v2(41.326,16.078) 41.326,24.892 41.961,25.527 v2(43.891,25.527)
PWM7: PWM3.1 STM1.61 | length 66.6
  Top Layer w0.254: STM1.61 71.473,33.888 74.034,36.449 91.719,36.449 92.558,35.611 v2(92.558,33.452) ; v2(92.583,27.61) 92.583,11.963 93.802,10.744 98.823,10.744 PWM3.1
  Bottom Layer w0.254: v2(92.558,33.452) 92.583,33.426 v2(92.583,27.61)
PWM8: PWM1.1 STM1.59 | length 52.7
  Top Layer w0.254: STM1.59 72,32.888 72.615,33.503 v2(88.011,33.503) ; PWM1.1 89.141,27.724 v2(89.154,27.737)
  Bottom Layer w0.254: v2(88.011,33.503) 88.646,33.503 89.154,32.995 v2(89.154,27.737)
R1: "RELAY 1.1" "RELAY 1.2" STM1.95 | length 16.4
  Top Layer w0.254: 44.221,55.931 44.221,53.391 45.822,53.391 50.77,48.443 STM1.95
R2: "RELAY 1.3" "RELAY 1.4" STM1.96 | length 18.3
  Top Layer w0.254: 41.681,55.931 41.681,53.391 43.536,51.537 46.838,51.537 50.27,48.104 STM1.96
R3: "RELAY 1.5" "RELAY 1.6" STM1.97 | length 21
  Top Layer w0.254: 39.141,55.931 39.141,53.391 39.141,52.019 40.234,50.927 46.711,50.927 49.77,47.868 STM1.97
R4: "RELAY 1.7" "RELAY 1.8" STM1.98 | length 23.1
  Top Layer w0.254: 36.601,55.931 36.601,53.391 36.601,51.587 37.77,50.419 46.457,50.419 49.27,47.606 STM1.98
R5: "RELAY 2.1" "RELAY 2.2" STM1.38 | length 12.4
  Top Layer w0.254: STM1.38 54.27,21.651 56.921,18.999 56.921,17.831
  Top Layer w0.762: 56.921,15.291 56.921,17.831
R6: "RELAY 2.3" "RELAY 2.4" STM1.37 | length 11.6
  Top Layer w0.254: STM1.37 53.77,20.068 54.381,19.456 54.381,17.831
  Top Layer w0.762: 54.381,15.291 54.381,17.831
R7: "RELAY 2.5" "RELAY 2.6" STM1.36 | length 11.9
  Top Layer w0.254: 51.841,17.831 53.27,19.259 STM1.36
  Top Layer w0.762: 51.841,15.291 51.841,17.831
R8: "RELAY 2.7" "RELAY 2.8" STM1.35 | length 13.1
  Top Layer w0.254: 49.301,17.831 49.86,17.831 52.77,20.74 STM1.35
  Top Layer w0.762: 49.301,15.291 49.301,17.831
RS: P1.12 STM1.84 | length 39.2
  Top Layer w0.254: STM1.84 56.27,47.1 56.566,47.396 73.127,47.396 76.708,50.978 76.708,55.474 75.844,56.337 71.044,56.337 P1.12
RW: P1.14 STM1.85 | length 35.4
  Top Layer w0.254: STM1.85 55.765,43.142 55.765,44.103 55.752,44.116 55.752,47.523 56.109,47.879 72.847,47.879 76.2,51.232 76.2,54.813 75.311,55.702 72.949,55.702 P1.14
SPI1_MISO: SPI2.3 STM1.31 | length 29.2
  Top Layer w0.254: SPI2.3 31.001,18.936 32.664,20.599 49.269,20.599 50.775,22.105 50.775,26.633 STM1.31
SPI1_MOSI: SPI2.4 STM1.32 | length 33.7
  Top Layer w0.254: SPI2.4 29.808,13.995 36.738,13.995 37.744,15.002 37.744,18.923 38.938,20.117 49.469,20.117 51.265,21.913 51.265,26.638 STM1.32
SPI1_SCK: SPI2.5 STM1.30 | length 33.7
  Top Layer w0.254: SPI2.5 25.921,18.987 28.016,21.082 49.069,21.082 50.27,22.282 STM1.30
SPI3_MISO: SPI1.3 STM1.79 | length 31.4
  Top Layer w0.254: STM1.79 58.77,44.952 60.071,46.253 77.787,46.253 SPI1.3
SPI3_MOSI: SPI1.4 STM1.91 | length 58.1
  Top Layer w0.254: STM1.91 52.77,41.972 53.823,40.919 60.706,40.919 62.332,42.545 86.208,42.545 93.878,50.216 93.878,53.772 92.837,54.813 88.087,54.813 87.388,54.114 SPI1.4
SPI3_SCK: SPI1.5 STM1.78 | length 35.8
  Top Layer w0.254: STM1.78 59.27,44.77 60.271,45.771 82.384,45.771 SPI1.5
SWC: ST-LINK1.4 STM1.76 | length 35.4
  Top Layer w0.254: STM1.76 61.684,44.552 67.183,44.552 v2(68.25,43.485) ; v2(68.25,26.187) 68.25,24.359 69.433,23.176 ST-LINK1.4
  Bottom Layer w0.254: v2(68.25,26.187) v2(68.25,43.485)
SWD: ST-LINK1.3 STM1.72 | length 30.2
  Top Layer w0.254: STM1.72 65.946,39.388 v2(65.964,39.37) ; v2(67.056,26.289) 67.056,21.92 68.341,20.636 ST-LINK1.3
  Bottom Layer w0.254: v2(65.964,39.37) 66.624,39.37 67.056,38.938 v2(67.056,26.289)
UART4_RX: RF1.4 STM1.24 | length 41.6
  Top Layer w0.254: STM1.24 47.32,29.388 48.031,28.677 v2(57.887,28.677) ; v2(61.392,27.254) 73.838,27.254 RF1.4
  Bottom Layer w0.254: v2(57.887,28.677) 59.969,28.677 v2(61.392,27.254)
UART4_TX: RF1.3 STM1.23 | length 41.4
  Top Layer w0.254: STM1.23 57.844,29.888 v2(57.861,29.87) ; v2@60.63,29.921 60.63,28.931 61.239,28.321 75.311,28.321 RF1.3
  Bottom Layer w0.254: v2(57.861,29.87) 60.554,29.87 v2(60.604,29.921)
UART5_RX: "LA BAN1.2" STM1.83 | length 28.1
  Top Layer w0.254: STM1.83 56.77,41.884 57.201,41.453 60.528,41.453 62.586,43.51 v2(64.643,43.51)
  Bottom Layer w0.254: v2(64.643,43.51) 65.176,44.044 65.176,59.69 66.061,60.575 66.061,60.851
UART5_TX: "LA BAN1.1" STM1.80 | length 45.6
  Top Layer w0.254: STM1.80 58.275,43.142 58.275,45.219 59.792,46.736 73.33,46.736 77.191,50.597 77.191,55.673 75.841,57.023 64.795,57.023 63.521,58.297 63.521,60.851
USART1_RX: STM1.69 USART1.1 | length 33.2
  Top Layer w0.254: STM1.69 68.52,37.888 v2(69.139,38.506) ; v2(75.184,47.473) 77.673,49.962 77.673,55.873 76.671,56.875 USART1.1
  Bottom Layer w0.254: v2(69.139,38.506) 69.113,38.532 75.184,44.602 v2(75.184,47.473)
USART1_TX: STM1.68 USART1.2 | length 34.5
  Top Layer w0.254: STM1.68 69.62,37.388 v2(70.51,38.278) ; v2(76.479,47.574) 76.479,47.625 78.384,49.53 78.384,60.024 USART1.2
  Bottom Layer w0.254: v2(70.51,38.278) 76.479,44.247 v2(76.479,47.574)
pads on no net: "RELAY 1.9" "RELAY 1.10" "RELAY 1.11" "RELAY 1.12" D1.0 EXTI1.1 EXTI2.1 EXTI3.1 EXTI4.1 RF1.5 U1.4 Y1.0

## Polygon pours and split planes (outlines as drawn)
GND on Bottom Layer "GND_L02_P000" (solid, pour order 0): 0,0 0,68.224 105.562,68.224 105.562,0
GND on Top Layer "GND_L01_P002" (solid, remove dead copper, pour order 2): 105.562,0 105.562,68.224 0,68.224 0,0

## Keep-outs
Keep-Out Layer:
  the board outline again, w0.254

## Silkscreen, mask and mechanical layers (free items; w line width, h text height)
Top Overlay:
  lines w0.2: 0.341,25.756 10.236,25.756 10.236,58.42 ; 0.432,9.042 95.199,9.042 ; 0.457,58.496 93.828,58.496 ; 13.03,58.496 13.03,67.742 ; 14.707,0.203 14.707,8.941 ; 25.73,58.496 25.73,67.742 ; 32.614,39.04 32.639,39.04 ; 38.862,58.496 38.989,58.496 38.989,67.742 ; 40.132,9.042 40.767,9.042 40.767,0.279 ; 53.594,9.042 53.721,9.042 53.721,0.33 ; 55.982,58.496 55.982,67.742 ; 66.319,8.915 66.446,8.915 66.446,0.533 ; 69.545,13.132 69.545,27.076 77.927,27.076 ; 72.796,58.496 72.796,67.691 ; 80.061,13.513 88.392,13.513 ; 92.329,0.33 92.329,8.941 ; 93.828,67.742 93.828,58.496 ; 95.275,39.472 95.199,39.472 95.199,38.938 105.308,38.938 ; 105.131,9.042 104.75,9.042 95.199,9.042 ; 93.828,58.496 95.199,58.496 95.199,9.042
  lines w0.254: 0.432,12.09 95.199,12.09 ; 27.737,0.356 27.737,9.042 27.737,11.989 ; 69.545,13.132 77.927,13.132 77.927,27.076 ; 79.578,0.254 79.578,8.915 79.578,12.014 ; 80.061,13.513 80.061,29.489 88.392,29.489 88.392,13.513 ; 95.199,12.192 95.199,12.217 ; 0.432,0.33 105.308,0.33 105.308,67.742 0.432,67.742 0.432,9.042 0.432,0.33
  text "5V" at 98.933,66.243 h0.76
  text "3.3V" at 97.536,63.5 h0.76
  text "PC2" at 6.618,62.676 h0.76 r90
  text "3.3V" at 9.361,62.676 h0.76 r90
  text "GND" at 11.85,62.676 h0.76 r90
  text "PC0" at 19.739,62.676 h0.76 r90
  text "3.3V" at 22.533,62.676 h0.76 r90
  text "GND" at 24.845,62.676 h0.76 r90
  text "PC3" at 32.767,62.676 h0.76 r90
  text "3.3V" at 35.51,62.676 h0.76 r90
  text "GND" at 37.872,62.676 h0.76 r90
  text "PC1" at 45.97,62.676 h0.76 r90
  text "3.3V" at 48.282,62.676 h0.76 r90
  text "GND" at 50.923,62.676 h0.76 r90
  text "TX" at 64.041,62.676 h0.76 r90
  text "RX" at 66.491,62.676 h0.76 r90
  text "5V" at 69.091,62.676 h0.76 r90
  text "GND" at 71.516,62.676 h0.76 r90
  text "RX" at 77.141,62.676 h0.76 r90
  text "TX" at 79.691,62.676 h0.76 r90
  text "5V" at 82.366,62.676 h0.76 r90
  text "GND" at 84.691,62.676 h0.76 r90
  text "UART5" at 58.115,61.316 h0.76 r90
  text "GND" at 98.171,61.061 h0.76
  text "GND" at 98.171,58.546 h0.76
  text "PA11" at 97.79,56.032 h0.76
  text "5V" at 5.134,53.823 h0.76
  text "PA8" at 98.171,53.568 h0.76
  text "3.3V" at 81.657,51.598 h0.76 r270
  text "MISO" at 84.375,51.598 h0.76 r270
  text "PC9" at 98.171,51.358 h0.76
  text "3.3V" at 5.134,51.247 h0.76
  text "GND" at 79.133,51.257 h0.76 r270
  text "MOSI" at 86.728,51.257 h0.76 r270
  text "SCK" at 89.09,51.257 h0.76 r270
  text "NSS" at 92.138,51.257 h0.76 r270
  text "PC8" at 98.171,48.691 h0.76
  text "GND" at 5.134,48.671 h0.76
  text "PE2" at 5.134,46.096 h0.76
  text "PC7" at 98.171,45.923 h0.76
  text "PC6" at 98.171,43.586 h0.76
  text "PE3" at 5.134,43.52 h0.76
  text "PE4" at 5.134,40.945 h0.76
  text "PD11" at 97.79,40.868 h0.76
  text "ROBOCON" at 71.653,39.751 h2.54
  text "PE5" at 5.134,38.369 h0.76
  text "5V" at 98.882,36.195 h0.76
  text "PE6" at 5.134,35.794 h0.76
  text "EPU" at 75.895,33.757 h3.05
  text "3.3V" at 97.485,33.579 h0.76
  text "PC13" at 5.134,33.218 h0.76
  text "GND" at 98.12,31.14 h0.76
  text "PC15" at 5.134,30.643 h0.76
  text "GND" at 98.12,28.499 h0.76
  text "PC15" at 5.134,28.067 h0.76
  text "PD10" at 97.485,25.984 h0.76
  text "GND" at 84.938,25.324 h0.76
  text "PD9" at 98.12,23.343 h0.76
  text "SWC" at 70.967,22.936 h0.76
  text "3.3V" at 84.938,22.835 h0.76
  text "PD8" at 98.12,20.828 h0.76
  text "SWD" at 70.967,20.142 h0.76
  text "TX" at 84.938,20.117 h0.76
  text "PB15" at 97.485,18.339 h0.76
  text "GND" at 70.967,17.653 h0.76
  text "RX" at 84.938,17.551 h0.76
  text "NSS" at 23.788,17.425 h0.76 r90
  text "SCK" at 26.379,17.425 h0.76 r90
  text "MOSI" at 28.588,17.425 h0.76 r90
  text "MISO" at 31.179,17.425 h0.76 r90
  text "3.3V" at 33.973,17.425 h0.76 r90
  text "GND" at 36.564,17.425 h0.76 r90
  text "PB14" at 97.485,15.799 h0.76
  text "3.3V" at 70.333,15.062 h0.76
  text "PB13" at 97.485,13.36 h0.76
  text "PB12" at 97.485,10.744 h0.76
  text "TIMER1" at 51.562,10.058 h1.02
  text "TIMER2" at 11.887,9.982 h1.02
  text "TIMER4" at 85.827,9.881 h1.02
  text "GND" at 2.809,4.935 h0.76 r270
  text "5V" at 5.78,4.935 h0.76 r270
  text "PC4" at 8.371,4.935 h0.76 r270
  text "PA2" at 10.987,4.935 h0.76 r270
  text "GND" at 15.755,4.935 h0.76 r270
  text "5V" at 18.472,4.935 h0.76 r270
  text "PC5" at 21.038,4.935 h0.76 r270
  text "PA3" at 23.883,4.935 h0.76 r270
  text "GND" at 28.774,4.935 h0.76 r270
  text "5V" at 31.568,4.935 h0.76 r270
  text "PE8" at 34.235,4.935 h0.76 r270
  text "PE9" at 36.648,4.935 h0.76 r270
  text "GND" at 41.878,4.935 h0.76 r270
  text "5V" at 44.443,4.935 h0.76 r270
  text "PE10" at 47.009,4.935 h0.76 r270
  text "PE11" at 49.752,4.935 h0.76 r270
  text "GND" at 55.132,4.935 h0.76 r270
  text "5V" at 57.621,4.935 h0.76 r270
  text "PE12" at 59.958,4.935 h0.76 r270
  text "PE13" at 62.752,4.935 h0.76 r270
  text "GND" at 67.857,4.935 h0.76 r270
  text "5V" at 70.524,4.935 h0.76 r270
  text "PE15" at 72.886,4.935 h0.76 r270
  text "PE14" at 75.299,4.935 h0.76 r270
  text "GND" at 80.755,4.935 h0.76 r270
  text "5V" at 83.499,4.935 h0.76 r270
  text "PD13" at 86.293,4.935 h0.76 r270
  text "PD12" at 89.061,4.935 h0.76 r270
  text "GND" at 93.786,4.935 h0.76 r270
  text "5V" at 96.402,4.935 h0.76 r270
  text "PD15" at 99.171,4.935 h0.76 r270
  text "PD14" at 101.635,4.935 h0.76 r270

## Text inside footprints (layer, text, board x,y; h text height)
P1: Top Overlay "2" at 53.899,53.924 h0.76; Top Overlay "1" at 53.899,51.384 h0.76; Top Overlay "15" at 75.743,51.384 h0.76; Top Overlay "16" at 75.743,53.924 h0.76
"RELAY 1": Bottom Overlay "2" at 46.761,55.423 h1.27; Bottom Overlay "1" at 46.761,52.883 h1.27; Bottom Overlay "1" at 29.489,52.883 h1.27; Bottom Overlay "1" at 28.473,52.883 h1.27; Bottom Overlay "12" at 29.489,55.423 h1.27
"RELAY 2": Bottom Overlay "12" at 42.189,17.323 h1; Bottom Overlay "1" at 41.173,14.783 h1; Bottom Overlay "1" at 42.189,14.783 h1; Bottom Overlay "1" at 59.461,14.783 h1; Bottom Overlay "2" at 59.461,17.323 h1